# Altium PCB PCB1.PcbDoc
Units mm, origin at the board's own origin, x right, y up, seen from the top; angles counter-clockwise.
Board outline 152.4 x 101.6 mm, 2 copper layers (Top Layer, Bottom Layer); 6 components, 3 nets, 12 pads, 18 vias.
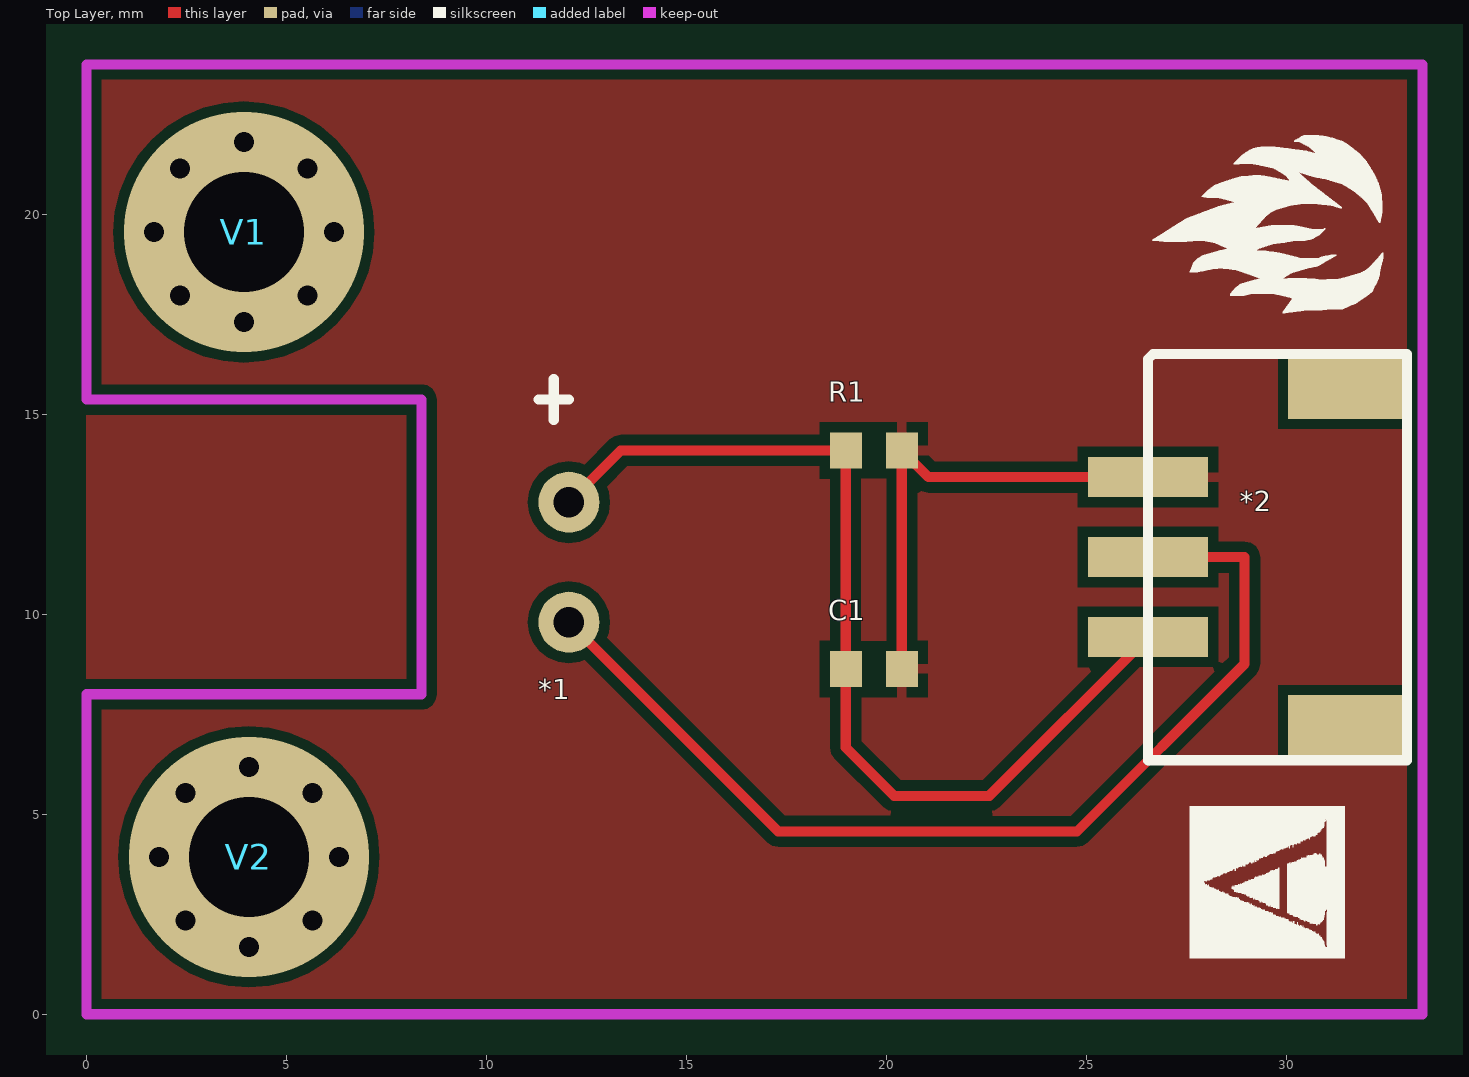
[diagram p0: Top Layer view]
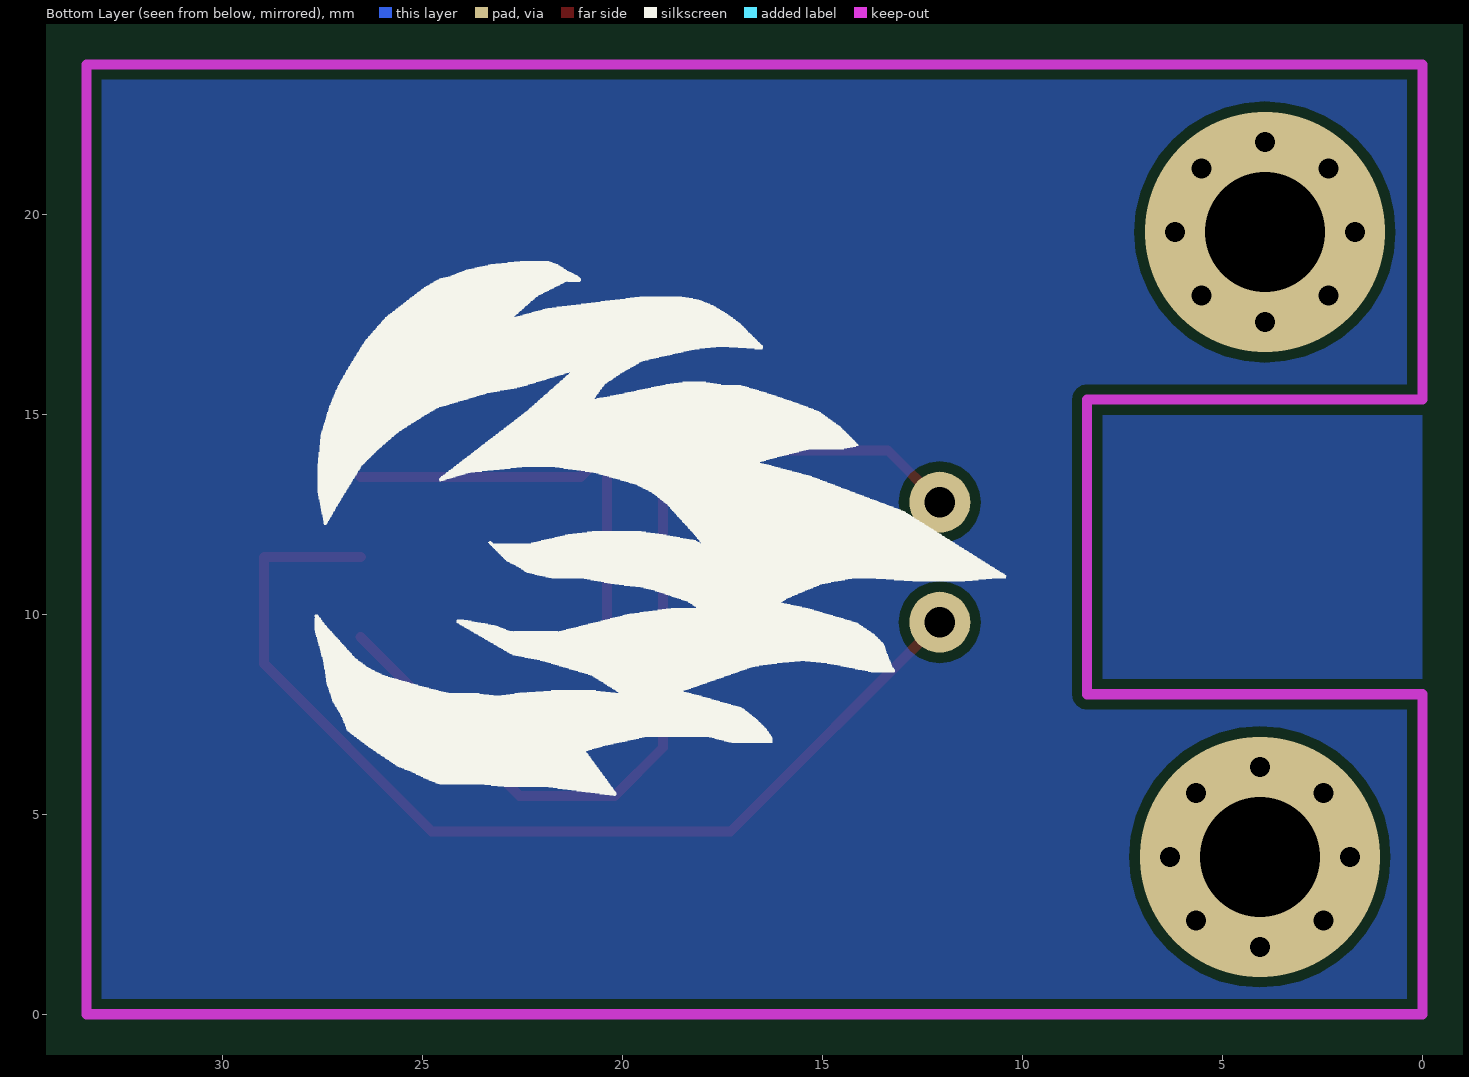
[diagram p1: Bottom Layer view, seen from below]

## Layer stack, top to bottom
Top Layer: signal copper 0.0356
Dielectric: dielectric 0.32, FR-4, Dk 4.8
Bottom Layer: signal copper 0.0356

## Board outline
-53.467,-54.483 98.933,-54.483 98.933,47.117 -53.467,47.117

## Design rules (kind name [scope] priority, off if disabled: settings)
Clearance [All] p1: gap=0.254
PolygonConnect [All] p1: connectstyle=Relief reliefconductorwidth=0.254 reliefentries=4 polygonreliefangle="90 Angle"
RoutingVias [All] p1: holewidth=0.711 width=1.27 viastyle="Through Hole" minholewidth=0.711 minwidth=1.27 maxholewidth=0.711 maxwidth=1.27
SilkscreenOverComponentPads [All] p1: minsilkscreentomaskgap=0.254
SolderMaskExpansion [All] p1: expansion=0.102
Width [All] p1: maxlimit=0.254 minlimit=0.254 preferedwidth=0.254
27 further rules are at their usual default settings.

## Components (designator, comment, footprint, x,y, rotation, side; value= is the part's Value field where it differs from the comment)
*1 "YG1006" Q 12.065,11.303 r270 top
*2 "sh-2.0" sh-2.0 26.543,11.43 r90 top
C1 "0.01uF" 1608[0603] 19.685,8.636 r0 top
R1 "1K" 1608[0603] 19.685,14.097 r0 top
V1 "Via" VIA 3.937,19.558 r0 top
V2 "Via" VIA 4.064,3.937 r0 top

## Footprints (in the part's own frame and the unit in brackets; to place one, negate y for a bottom-side part, rotate by r counter-clockwise, add the part's x,y. Pads: shape width x height; smd on the part's side, far side on the other; paste and mask are expansions set on the pad)
1608[0603] [mm] "Chip Capacitor, Body 1.6x0.8mm, IPC High Density"
  rect 0.8x0.9 smd: 1(-0.7,0) 2(0.7,0)
  body extent -0.87,-0.48 0.87,0.48, height 1.3
Q [mil]
  round 60 hole 30: 1(-59.06,0) 2(59.06,0)
sh-2.0 [mm]
  rect 1x3 smd: 1(-2,0) 2(0,0) 3(2,0) 3(2,0)
  rect 1.5x3 smd: GND(-4.2,-5) GND(4.2,-5)
  silkscreen extent -5.08,-6.48 5.08,0
VIA [mm]

## Part data
C1: library part CAP
R1: library part RES

## Via types
v1: diameter 1, hole 0.5, Top Layer to Bottom Layer, 16 vias
v2: diameter 6, hole 3, Top Layer to Bottom Layer, 2 vias

## Nets (pads, with @x,y where several pads share a name; then routed paths per layer and width w, separated by ;. In a path a pad name is that pad's centre, name@x,y a point inside that pad or via, vN(x,y) a via of type N, cw(c..) or ccw(c..) an arc to the next point about the centre after c; other vN are vias at no path point)
GND: *2.3 C1.2 R1.2 | length 11.9
  Top Layer w0.254: C1.2 R1.2 21.052,13.43 *2.3@26.543,13.43
Net*1_1: *1.1 *2.1 C1.1 R1.1 | length 24.6
  Top Layer w0.254: *1.1 13.359,14.097 R1.1 C1.1 18.985,6.669 20.193,5.461 22.574,5.461 *2.1
Net*1_2: *1.2 *2.2 | length 25.9
  Top Layer w0.254: *1.2 17.296,4.572 24.765,4.572 28.956,8.763 28.956,11.43 *2.2
pads on no net: *2.GND
copper on no net:
  other v1: 4.064,1.687 2.473,2.346 5.655,2.346 1.814,3.937 6.314,3.937 2.473,5.528 5.655,5.528 4.064,6.187 3.937,17.308 2.346,17.967 5.528,17.967 1.687,19.558 6.187,19.558 2.346,21.149 5.528,21.149 3.937,21.808
  other v2: 4.064,3.937 3.937,19.558

## Polygon pours and split planes (outlines as drawn)
GND on Top Layer "Top Layer-No Net" (solid, pour order 4): 0,0.254 0,23.749 33.401,23.749 33.401,0 0,0
GND on Bottom Layer "Top Layer-No Net" (solid, pour order 6): 0,23.749 33.401,23.749 33.401,0 0,0

## Keep-outs
Keep-Out Layer:
  lines w0.254: 0,0 33.401,0 33.401,23.749 0,23.749 0,15.367 8.382,15.367 8.382,8.001 0,8.001 0,0

## Silkscreen, mask and mechanical layers (free items; w line width, h text height)
Top Overlay:
  drawing of 4733 lines, arcs and shapes, not listed
Bottom Overlay:
  drawing of 3526 lines, arcs and shapes, not listed
Top Solder:
  circle w0.5: c8.513,19.685 r0.25
  text "Flame Sensor" at 9.525,2.286 h1